# Altium PCB PCB_2020-10-26_09-59-11_2021-08-17.pcbdoc
Units mm, origin at the board's own origin, x right, y up, seen from the top; angles counter-clockwise.
Board outline 98.82 x 71.83 mm, 2 copper layers (Top Layer, Bottom Layer); 37 components, 72 nets, 204 pads, 26 vias.
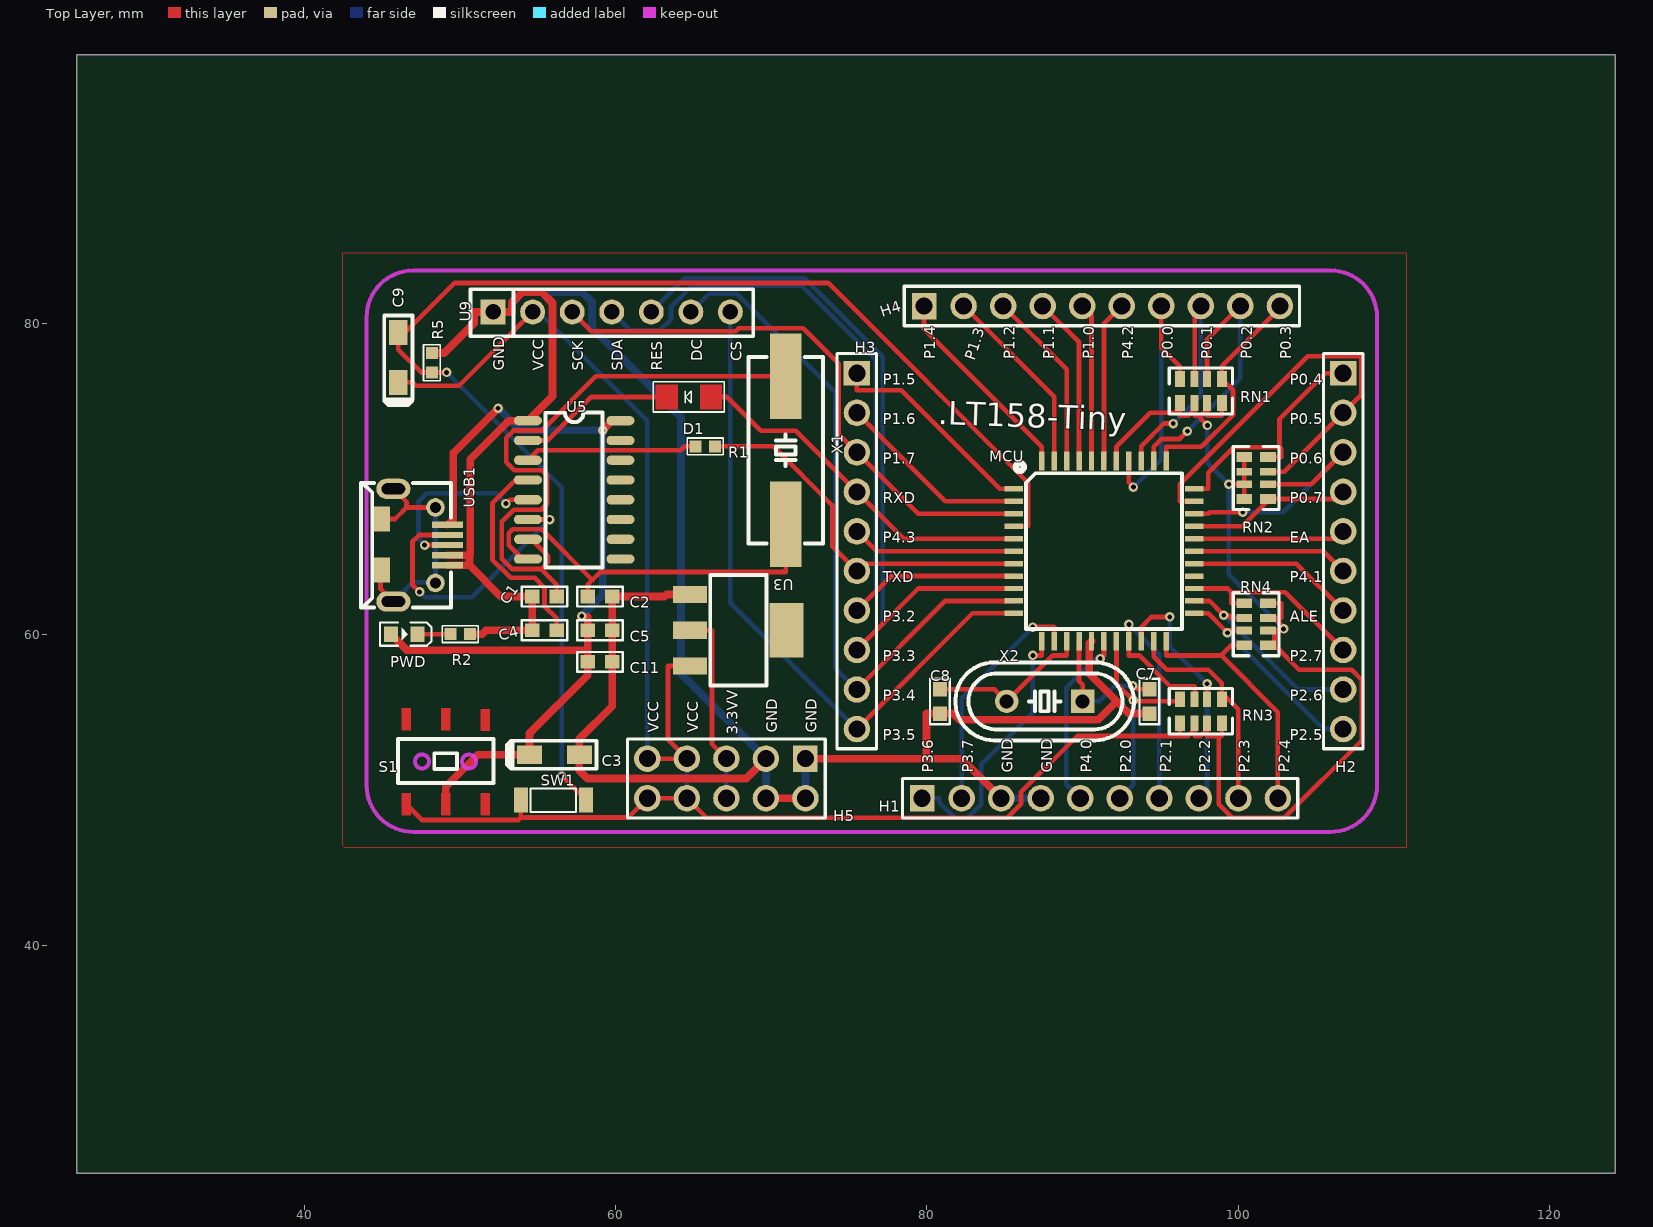
[diagram p0: Top Layer view]
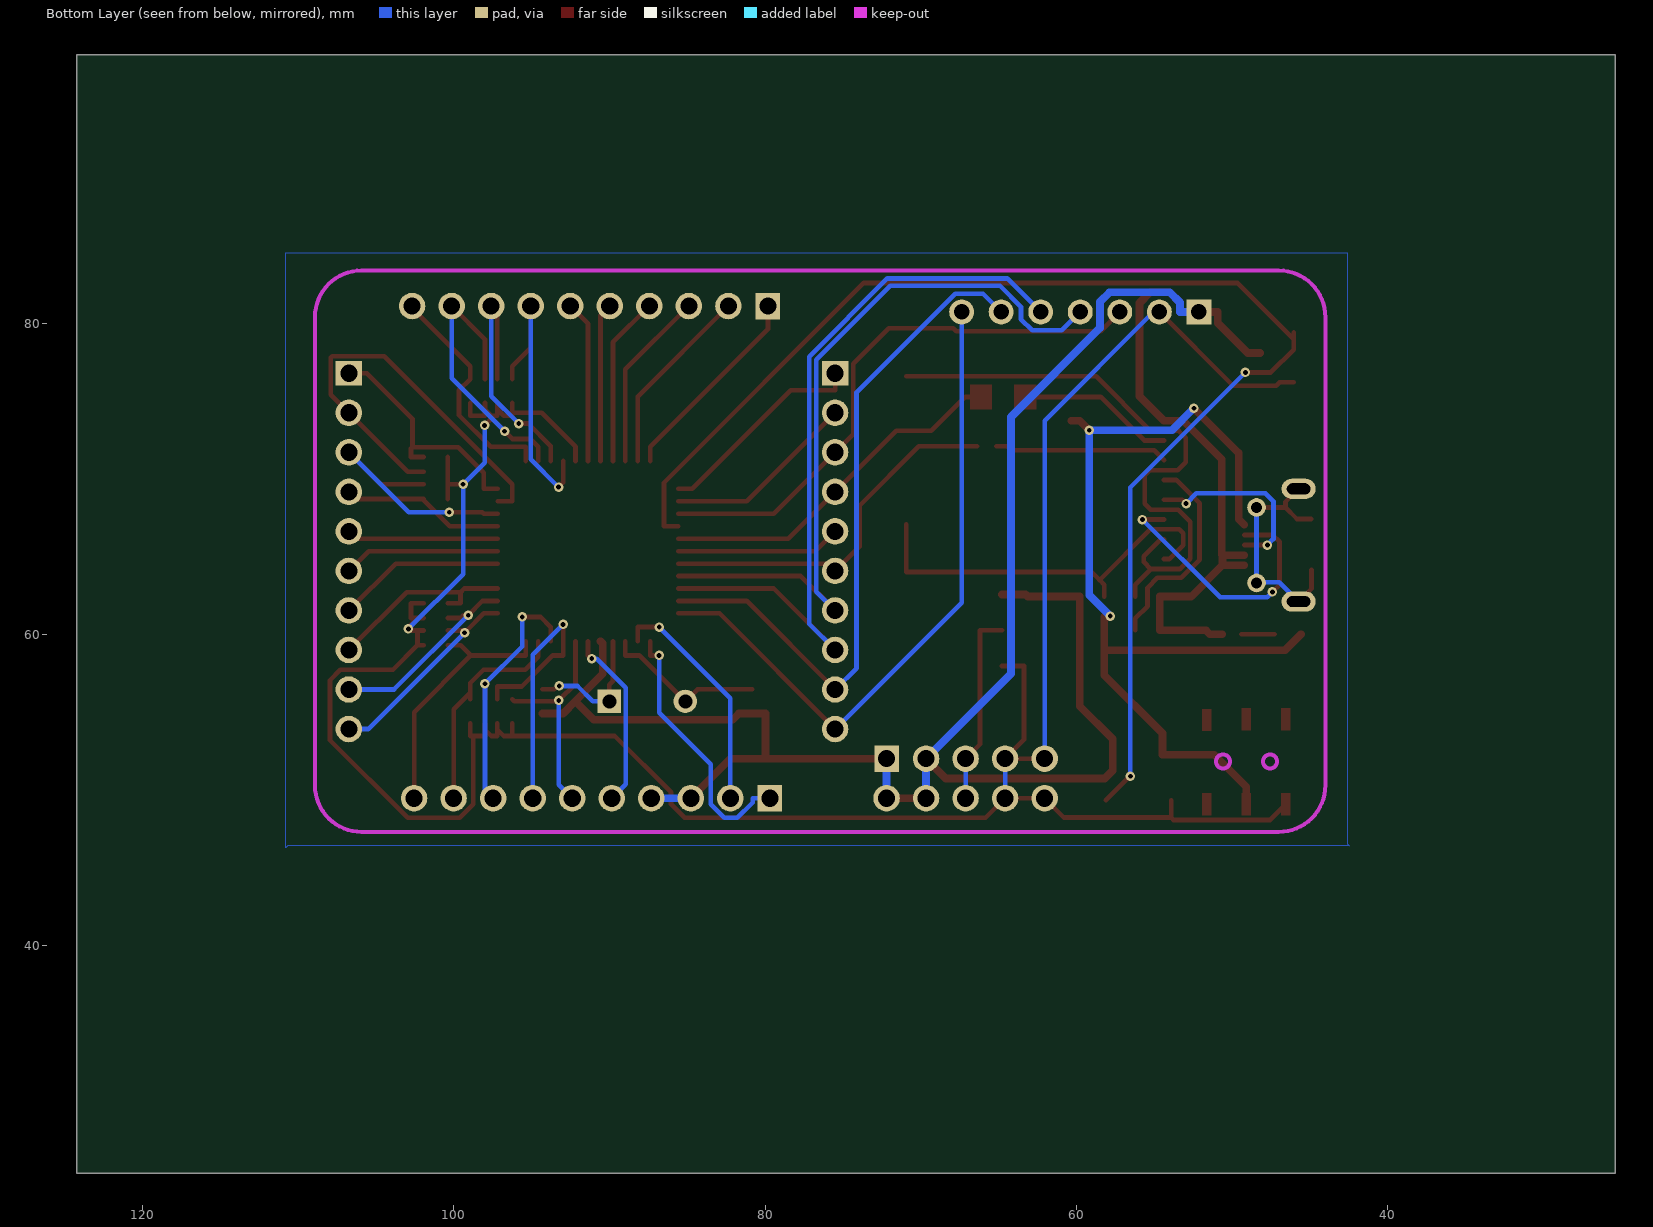
[diagram p1: Bottom Layer view, seen from below]

## Layer stack, top to bottom
Top Layer: signal copper (thickness not stored)
Dielectric: dielectric 0.32, FR-4, Dk 4.8
Bottom Layer: signal copper (thickness not stored)

## Board outline
124.216,25.4 25.4,25.4 25.4,97.235 124.216,97.235

## Components (designator, comment, footprint, x,y, rotation, side; value= is the part's Value field where it differs from the comment)
C1 "30pf" CAP0603 55.441,62.437 r0 top
C2 "30pf" CAP0603 58.997,62.437 r0 top
C3 "470uF" CAP-T3216-A 56.076,52.277 r0 top
C4 "0.1uf" CAP0603 55.441,60.278 r180 top
C5 "0.1uf" CAP0603 58.997,60.278 r180 top
C7 "30pf" CAP0603 94.303,55.706 r90 top
C8 "30pf" CAP0603 80.841,55.706 r90 top
C9 "10uF" CAP-T3216-A 46.043,77.804 r90 top
C11 "104" CAP0603 58.997,58.246 r180 top
D1 "1N4148" D-1206 64.712,75.264 r90 top
H1 "Header-Male-2.54_1x10" HDR-TH_10P-P2.54-V 91.128,49.483 r0 top
H2 "Header-Male-2.54_1x10" HDR-TH_10P-P2.54-V 106.749,65.358 r270 top
H3 "Header-Male-2.54_1x10" HDR-TH_10P-P2.54-V 75.507,65.358 r270 top
H4 "Header-Male-2.54_1x10" HDR-TH_10P-P2.54-V 91.255,81.106 r0 top
H5 "X6521FV-2×05-C85D32" HDR-TH_10P-P2.54-V-F-R2-C5-S2.54 67.125,50.753 r180 top
MCU "STC89C52RC-40I_LQFP44" LQFP-44_L10.0-W10.0-P0.80-LS12.0-BL 91.382,65.358 r270 top
PWD "led Green" D0603-RD 46.424,60.024 r180 top
R1 "100" 0603 66.363,72.089 r0 top
R2 "1k" 0603 50.615,60.024 r0 top
R5 "1K" 0603 48.202,78.058 r90 top
RN1 "10K*4" 0603_X4 97.605,75.645 r180 top
RN2 "10K*4" 0603_X4 101.161,70.057 r90 top
RN3 "10K*4" 0603_X4 97.605,55.071 r180 top
RN4 "10K*4" 0603_X4 101.161,60.659 r270 top
S1 "六脚贴片拨动开关" MSS-22C02 51.631,49.102 r90 top
SW1 "UK-B0240-W-250-JZ" 龟仔微动 53.917,49.356 r0 top
U3 "AMS1117" SOT-223_L6.7-W3.5-P2.30-BR 67.887,60.278 r180 top
U5 "CH340G" SOIC-16_L9.9-W3.9-P1.27-LS6.0-BR 57.346,69.295 r180 top
U9 "OLED_SPI_12864" 2.54-7P 59.759,80.725 r0 top
USB1 "microusb" MICRO-USB-SMD_5P-P0.65-H-F_C10418 47.059,65.739 r270 top
X1 "12M" HC-49-SMD_L12.0-W4.8 70.935,71.835 r270 top
X2 "11.0592M" HC-49US_L11.5-W4.5-P4.88 87.572,55.706 r180 top
? "" ? 76.396,46.039 r0 top
? "" ? 44.065,65.358 r0 top
? "" ? 102.621,65.513 r0 top
? "" ? 91.051,53.801 r0 top
? "" ? 50.736,67.725 r0 top

## Footprints (in the part's own frame and the unit in brackets; to place one, negate y for a bottom-side part, rotate by r counter-clockwise, add the part's x,y. Pads: shape width x height; smd on the part's side, far side on the other; paste and mask are expansions set on the pad)
2.54-7P [mm]
  rect 1.6x1.6 hole 1: 1(-7.62,0)
  round 1.6 hole 1: 2(-5.08,0) 3(-2.54,0) 4(0,0) 5(2.54,0) 6(5.08,0) 7(7.62,0)
  silkscreen extent -9.09,-1.56 9.09,1.46
0603 [mil]
  rect 30x30 smd: 1(1,0) 2(-48,0)
  silkscreen extent -69,-21 22,21
0603_X4 [mm]
  rect 0.635x1.016 smd: 1(-1.35,-0.77) 4(1.35,-0.77) 5(1.35,0.77) 8(-1.35,0.77)
  rect 0.508x1.016 smd: 2(-0.4,-0.77) 3(0.4,-0.77) 6(0.4,0.77) 7(-0.4,0.77)
  silkscreen extent -2.02,-1.47 2.02,1.47
CAP0603 [mil]
  rect 37x35 smd: 1(-31,0) 2(31,0)
  silkscreen extent -58,-25 58,25
CAP-T3216-A [mm]
  rect 1.6x1.2 smd: 1(-1.6,0) 2(1.6,0)
  silkscreen extent -3.05,-0.9 2.7,0.9
D0603-RD [mm]
  rect 0.9x1 smd: 1(-0.85,0) 2(0.85,0)
  silkscreen extent -1.75,-0.75 1.55,0.75
D-1206 [mm]
  round 0 smd: 1(0,-1.425) 2(0,1.425)
  Top Layer region: 0.787,2.123 0.787,0.726 -0.787,0.726 -0.787,2.123
  Top Layer region: 0.787,-0.726 0.787,-2.123 -0.787,-2.123 -0.787,-0.726
  silkscreen extent -0.97,-2.29 0.97,2.29
HC-49-SMD_L12.0-W4.8 [mm]
  rect 5.5x2 smd: 1(-4.75,0) 2(4.75,0)
  silkscreen extent -6,-2.4 6,2.4
HC-49US_L11.5-W4.5-P4.88 [mm]
  rect 1.5x1.5 hole 0.9: 1(-2.438,0)
  round 1.5 hole 0.9: 2(2.438,0)
  silkscreen extent -5.74,-2.5 5.74,2.5
HDR-TH_10P-P2.54-V [mm]
  rect 1.575x1.7 hole 1.1: 1(-11.43,0)
  round 1.7 hole 1.1: 2(-8.89,0) 3(-6.35,0) 4(-3.81,0) 5(-1.27,0) 6(1.27,0) 7(3.81,0) 8(6.35,0) 9(8.89,0) 10(11.43,0)
  silkscreen extent -12.7,-1.27 12.7,1.27
HDR-TH_10P-P2.54-V-F-R2-C5-S2.54 [mm]
  rect 1.575x1.7 hole 1.1: 1(-5.08,-1.27)
  round 1.7 hole 1.1: 2(-5.08,1.27) 3(-2.54,-1.27) 4(-2.54,1.27) 5(0,-1.27) 6(0,1.27) 7(2.54,-1.27) 8(2.54,1.27) 9(5.08,-1.27) 10(5.08,1.27)
  silkscreen extent -6.35,-2.54 6.35,2.54
LQFP-44_L10.0-W10.0-P0.80-LS12.0-BL [mil]
  rect 13.8x47.24 smd: 1(-157.48,-228) 2(-125.98,-228) 3(-94.49,-228) 4(-62.99,-228) 5(-31.5,-228) 6(0,-228) 7(31.5,-228) 8(62.99,-228) 9(94.49,-228) 10(125.98,-228) 11(157.48,-228) 23(157.48,228) 24(125.98,228) 25(94.49,228) 26(62.99,228) 27(31.5,228) 28(0,228) 29(-31.5,228) 30(-62.99,228) 31(-94.49,228) 32(-125.98,228) 33(-157.48,228)
  rect 47.24x13.8 smd: 12(228,-157.48) 13(228,-125.98) 14(228,-94.49) 15(228,-62.99) 16(228,-31.5) 17(228,0) 18(228,31.5) 19(228,62.99) 20(228,94.49) 21(228,125.98) 22(228,157.48) 34(-228,157.48) 35(-228,125.98) 36(-228,94.49) 37(-228,62.99) 38(-228,31.5) 39(-228,0) 40(-228,-31.5) 41(-228,-62.99) 42(-228,-94.49) 43(-228,-125.98) 44(-228,-157.48)
  silkscreen extent -223,-223 197,197
MICRO-USB-SMD_5P-P0.65-H-F_C10418 [mm]
  oval 1.3x2.2 hole 0.7 slot 1.5 at 90 deg: 0(-3.619,-1.329) 0(3.619,-1.329)
  round 1.2 hole 0.7: 0(-2.425,1.371) 0(2.425,1.371)
  rect 1.6x1.2 smd: 0(-1.683,-2.14) 0(1.596,-2.156)
  rect 0.4x2 smd: 1(-1.31,2.156) 2(-0.66,2.156) 3(-0.01,2.156) 4(0.64,2.156) 5(1.29,2.156)
  silkscreen extent -4,-3.4 4,2.36
MSS-22C02 [mil]
  round 0 smd: 1(0,0) 2(0,100) 3(0,200) 4(215,200) 5(215,100) 6(212.6,0)
  Top Layer region: -27.56,-11.81 -27.56,11.81 27.56,11.81 27.56,-11.81
  Top Layer region: -27.56,88.19 -27.56,111.81 27.56,111.81 27.56,88.19
  Top Layer region: -27.56,188.19 -27.56,211.81 27.56,211.81 27.56,188.19
  Top Layer region: 185.04,-11.81 185.04,11.81 240.16,11.81 240.16,-11.81
  Top Layer region: 187.44,88.19 187.44,111.81 242.56,111.81 242.56,88.19
  Top Layer region: 187.44,188.19 187.44,211.81 242.56,211.81 242.56,188.19
  Keep-Out Layer lines w10: 125.72,160.19 ccw(c108,160.1) 125.72,160 ; 125.72,41.19 ccw(c108,41.1) 125.72,41
  silkscreen extent 54,-21 164,221
SOIC-16_L9.9-W3.9-P1.27-LS6.0-BR [mm]
  oval 1.8x0.6 smd: 1(2.972,-4.445) 2(2.972,-3.175) 3(2.972,-1.905) 4(2.972,-0.635) 5(2.972,0.635) 6(2.972,1.905) 7(2.972,3.175) 8(2.972,4.445) 9(-2.972,4.445) 10(-2.972,3.175) 11(-2.972,1.905) 12(-2.972,0.635) 13(-2.972,-0.635) 14(-2.972,-1.905) 15(-2.972,-3.175) 16(-2.972,-4.445)
  silkscreen extent -1.83,-4.98 1.85,4.98
SOT-223_L6.7-W3.5-P2.30-BR [mm]
  rect 2.2x1.1 smd: 1(3.099,-2.3) 2(3.099,0) 3(3.099,2.3)
  rect 2.2x3.5 smd: 4(-3.099,0)
  silkscreen extent -1.8,-3.55 1.8,3.55
龟仔微动 [mm]
  rect 0.9x1.6 smd: 1(0,0) 2(4.191,0)
  silkscreen extent 0.64,-0.76 3.56,0.76
? [mm]

## Via types
v1: diameter 0.61, hole 0.31, Top Layer to Bottom Layer, 26 vias

## Nets (pads, with @x,y where several pads share a name; then routed paths per layer and width w, separated by ;. In a path a pad name is that pad's centre, name@x,y a point inside that pad or via, vN(x,y) a via of type N, cw(c..) or ccw(c..) an arc to the next point about the centre after c; other vN are vias at no path point)
3.3V: H5.5 H5.6 U3.2 | length 12.6
  Top Layer w0.3: U3.2 66.2,60.278 66.2,52.947 H5.5
  Bottom Layer w0.3: H5.6 H5.5
+5V: C3.1 C5.2 C11.2 PWD.2 S1.2 U5.16 USB1.1 | length 61.2
  Top Layer w0.5: PWD.2 46.607,58.99 58.209,58.99 ; S1.2 49.091,50.212 51.156,52.277 C3.1 54.476,53.659 58.209,57.39 C11.2 58.209,58.99 ; USB1.1 49.578,67.413 49.578,71.654 v1(52.459,74.535) ; v1(57.826,61.19) 57.882,61.131 58.209,61.131 C5.2 58.209,58.99 ; v1(59.175,73.128) 59.787,73.74 U5.16
  Bottom Layer w0.5: v1(52.459,74.535) 53.866,73.128 v1(59.175,73.128) 59.175,62.538 v1(57.826,61.19)
ALE: H2.7 MCU.27 | length 10.8
  Top Layer w0.3: MCU.27 103.739,64.558 H2.7
CH340R: R1.2 U5.3 | length 11.1
  Top Layer w0.3: U5.3 55.009,71.835 64.196,71.835 64.45,72.089 R1.2
CH340T: D1.2 U5.2 | length 10.1
  Top Layer w0.3: U5.2 55.644,72.47 58.438,75.264 62.276,75.264 D1.2
DM: U5.6 USB1.2 | length 17.8
  Top Layer w0.3: v1(47.409,62.734) 46.955,63.186 46.955,65.95 47.407,66.399 USB1.2 ; U5.6 v1(55.766,67.39)
  Bottom Layer w0.3: v1(47.409,62.734) 47.742,62.401 50.777,62.401 v1(55.766,67.39)
DP: U5.5 USB1.3 | length 12.1
  Top Layer w0.3: v1(47.737,65.749) 47.902,65.749 USB1.3@49.215,65.749 ; v1(52.954,68.416) 53.195,68.66 U5.5
  Bottom Layer w0.3: v1(47.737,65.749) 47.346,66.14 47.346,68.563 47.859,69.076 52.294,69.076 v1(52.954,68.416)
EA: H2.5 MCU.29 | length 9.8
  Top Layer w0.3: MCU.29 106.279,66.158 H2.5
GND: C1.1 C2.2 C3.2 C4.2 C5.1 C7.1 C8.1 C11.1 H1.3 H1.4 H5.1 H5.2 H5.3 H5.4 MCU.16 R2.1 R5.1 U3.1 U5.1 U9.1 USB1.4 USB1.5 | length 162.1
  Top Layer w0.5: R5.1 48.994,78.083 50.93,80.019 50.93,80.725 U9.1 53.35,80.725 53.35,81.329 54.011,81.992 55.26,81.992 55.949,81.304 55.949,75.315 U5.1 53.147,73.74 50.663,71.256 50.663,65.137 50.625,65.099 ; USB1.5@49.215,64.448 50.48,64.448 ; USB1.4@49.215,65.099 50.625,65.099 ; R2.1 51.433,60.024 51.687,60.278 C4.2 C1.1 52.637,62.437 50.625,64.448 50.48,64.448 ; U3.1@64.788,62.576 63.277,62.576 63.137,62.437 C2.2 C5.1 C11.1 59.784,55.396 57.676,53.288 C3.2 57.676,51.266 58.189,50.753 68.395,50.753 H5.3 ; H5.4 H5.2 ; H5.1 79.987,52.023 ; H1.3 82.238,52.023 79.987,52.023 ; MCU.16 90.432,59.417 90.432,57.474 92.2,55.708 ; C7.1 93.876,54.918 92.987,54.918 92.2,55.708 ; 50.48,64.448 50.625,64.596 50.625,65.099 ; 79.987,52.023 79.987,54.918 C8.1 81.697,54.918 82.088,54.527 91.018,54.527 92.2,55.708
  Bottom Layer w0.5: U9.1 53.35,80.725 53.35,81.329 54.013,81.995 57.871,81.995 58.489,81.378 58.489,79.699 64.211,73.973 64.211,57.476 H5.3 H5.4 ; H5.2 H5.1 ; H1.3 H1.4
P0.0: H4.7 MCU.37 RN1.4 | length 19.4
  Top Layer w0.3: MCU.37 92.982,69.772 v1(93.279,69.475) ; H4.7 95.065,78.426 96.256,77.235 RN1.4@96.256,76.414
  Bottom Layer w0.3: v1(93.279,69.475) 95.065,71.261 H4.7
P0.1: H4.8 MCU.36 RN1.3 | length 16.8
  Top Layer w0.3: MCU.36 93.782,72.109 95.23,73.557 v1(95.837,73.557) ; RN1.3@97.206,76.414 97.206,80.704 H4.8
  Bottom Layer w0.3: v1(95.837,73.557) 97.605,75.322 H4.8
P0.2: H4.9 MCU.35 RN1.2 | length 18.5
  Top Layer w0.3: MCU.35 94.582,72.061 95.088,72.566 96.248,72.566 v1(96.741,73.056) ; RN1.2@98.006,76.414 98.006,78.965 H4.9
  Bottom Layer w0.3: v1(96.741,73.056) 100.145,76.463 H4.9
P0.3: H4.10 MCU.34 RN1.1 | length 14.9
  Top Layer w0.3: MCU.34 95.382,72.061 97.63,72.061 99.675,74.106 99.675,75.696 98.956,76.414 98.956,77.235 102.685,80.966 H4.10
P0.4: H2.1 MCU.33 RN2.4 | length 15.8
  Top Layer w0.3: MCU.33 98.085,69.358 98.085,70.397 99.723,72.038 102.664,72.038 ; RN2.4@101.93,71.405 102.751,71.405 102.751,71.949 102.664,72.038 ; H2.1 105.585,76.788 102.664,73.864 102.664,72.038
P0.5: H2.2 MCU.32 RN2.3 | length 27.5
  Top Layer w0.3: MCU.32 96.261,68.558 96.261,69.663 104.486,77.888 107.823,77.888 107.912,77.799 107.912,75.411 H2.2 102.959,70.456 102.751,70.456 RN2.3@101.93,70.456
P0.6: H2.3 MCU.31 RN2.2 | length 16.9
  Top Layer w0.3: MCU.31 98.085,67.758 98.184,67.855 v1(100.297,67.855) ; RN2.2@101.93,69.655 104.699,69.655 H2.3
  Bottom Layer w0.3: v1(100.297,67.855) 102.896,67.855 H2.3
P0.7: H2.4 MCU.30 RN2.1 | length 10.5
  Top Layer w0.3: MCU.30 100.272,66.958 101.93,68.617 101.93,68.705 106.289,68.705 H2.4
P1.0: H4.5 MCU.40 | length 10.2
  Top Layer w0.3: H4.5 90.582,80.509 MCU.40
P1.1: H4.4 MCU.41 | length 10.9
  Top Layer w0.3: H4.4 89.782,78.769 MCU.41
P1.2: H4.3 MCU.42 | length 11.6
  Top Layer w0.3: H4.3 88.981,77.029 MCU.42
P1.3: H4.2 MCU.43 | length 12.4
  Top Layer w0.3: H4.2 88.181,75.289 MCU.43
P1.4: H4.1 MCU.44 | length 13.1
  Top Layer w0.3: H4.1 79.825,79.617 87.381,72.061 MCU.44
P1.5: H3.1 MCU.1 | length 13.8
  Top Layer w0.3: H3.1 75.507,75.688 78.349,75.688 84.679,69.358 MCU.1
P1.6: H3.2 MCU.2 | length 12.4
  Top Layer w0.3: H3.2 81.196,68.558 MCU.2
P1.7: H3.3 MCU.3 U9.3 | length 36.5
  Top Layer w0.3: U9.3 58.451,79.493 67.732,79.493 67.925,79.683 72.05,79.683 74.343,77.387 74.343,72.871 H3.3 79.456,67.758 MCU.3
P2.0: H1.6 MCU.18 RN3.4 | length 14
  Top Layer w0.3: MCU.18 92.182,56.846 v1(93.264,55.764) 93.322,55.706 96.119,55.706 RN3.4@96.256,55.84
  Bottom Layer w0.3: H1.6 93.264,50.349 v1(93.264,55.764)
P2.1: H1.7 MCU.19 RN3.3 | length 19.9
  Top Layer w0.3: v1(92.982,60.654) MCU.19 92.982,58.655 93.642,58.655 95.636,56.661 97.206,56.661 RN3.3@97.206,55.84
  Bottom Layer w0.3: v1(92.982,60.654) 94.938,58.698 H1.7
P2.2: H1.8 MCU.20 RN3.2 | length 16.9
  Top Layer w0.3: MCU.20 93.782,60.478 94.435,61.131 v1(95.608,61.131) ; RN3.2@98.006,55.84 v1(98.006,56.834)
  Bottom Layer w0.3: v1(95.608,61.131) 95.608,59.231 v1(98.006,56.834) 98.006,50.009 H1.8
P2.3: H1.9 MCU.21 RN3.1 | length 14.3
  Top Layer w0.3: MCU.21 94.582,58.571 95.41,57.743 98.097,57.743 98.956,56.887 98.956,56.661 RN3.1@98.956,56.252 ; RN3.1@98.956,55.84 RN3.1@98.956,56.252 ; H1.9 100.018,55.188 RN3.1@98.956,56.252
P2.4: H1.10 MCU.22 RN4.4 | length 16.9
  Top Layer w0.3: MCU.22 95.382,58.655 98.915,58.655 ; RN4.4@100.391,59.307 99.571,59.307 98.915,58.655 ; H1.10 102.558,55.012 98.915,58.655
P2.5: H2.10 MCU.23 RN4.3 | length 13.8
  Top Layer w0.3: MCU.23@97.173,61.357 98.085,61.357 99.185,60.257 v1@99.312,60.257 ; v1(99.312,60.118) v1@99.312,60.257 ; RN4.3@100.391,60.257 v1@99.312,60.257
  Bottom Layer w0.3: v1(99.312,60.118) 105.504,53.928 H2.10
P2.6: H2.9 MCU.24 RN4.2 | length 13.3
  Top Layer w0.3: MCU.24@97.173,62.157 98.161,62.157 v1(99.078,61.24) 99.39,61.24 99.571,61.058 RN4.2@100.391,61.058
  Bottom Layer w0.3: v1(99.078,61.24) 103.851,56.468 H2.9
P2.7: H2.8 MCU.25 RN4.1 | length 12.7
  Top Layer w0.3: MCU.25@97.173,62.957 99.334,62.957 99.571,62.721 ; RN4.1@100.391,62.007 99.571,62.007 99.571,62.721 ; H2.8 103.035,62.721 99.571,62.721
P3.2: H3.7 MCU.8 U9.4 | length 48.7
  Top Layer w0.3: H3.7 77.717,63.758 MCU.8
  Bottom Layer w0.3: U9.4 60.942,79.541 62.852,79.541 63.569,80.257 63.569,81.068 64.915,82.414 71.961,82.414 76.713,77.662 76.713,62.752 H3.7
P3.3: H3.8 MCU.9 U9.5 | length 49.1
  Top Layer w0.3: H3.8 79.456,62.957 MCU.9@85.591,62.957
  Bottom Layer w0.3: U9.5 64.45,82.876 72.151,82.876 77.175,77.855 77.175,60.677 H3.8
P3.4: H3.9 MCU.10 U9.6 | length 44.5
  Top Layer w0.3: H3.9 81.196,62.157 MCU.10@85.591,62.157
  Bottom Layer w0.3: U9.6 66.007,81.893 67.798,81.893 74.13,75.561 74.13,57.844 H3.9
P3.5: H3.10 MCU.11 U9.7 | length 43.3
  Top Layer w0.3: H3.10 82.936,61.357 MCU.11@85.591,61.357
  Bottom Layer w0.3: U9.7 67.379,62.056 H3.10
P3.6: H1.1 MCU.12 | length 17.3
  Top Layer w0.3: v1(86.815,58.655) 87.381,58.655 MCU.12
  Bottom Layer w0.3: H1.1 80.798,49.483 80.798,49.208 81.786,48.22 82.639,48.22 83.508,49.089 83.508,51.657 86.815,54.964 v1(86.815,58.655)
P3.7: H1.2 MCU.13 | length 15.2
  Top Layer w0.3: v1(86.81,60.478) 88.181,60.478 MCU.13
  Bottom Layer w0.3: H1.2 82.238,55.906 v1(86.81,60.478)
P4.0: H1.5 MCU.17 | length 11.7
  Top Layer w0.3: v1(91.148,58.454) 91.349,58.655 91.382,58.655 MCU.17
  Bottom Layer w0.3: H1.5 88.948,50.392 88.948,56.59 90.813,58.454 v1(91.148,58.454)
P4.1: H2.6 MCU.28 | length 10.1
  Top Layer w0.3: MCU.28 105.479,65.358 H2.6
P4.2: H4.6 MCU.39 | length 10.4
  Top Layer w0.3: MCU.39 91.382,79.963 H4.6
P4.3: H3.5 MCU.6 | length 10.6
  Top Layer w0.3: H3.5 76.777,65.358 MCU.6
PSEN: MCU.26
R2_2: PWD.1 R2.2 | length 2.1
  Top Layer w0.3: PWD.1 48.037,60.024 R2.2
RST: C9.2 MCU.4 R5.2 SW1.2 | length 87
  Top Layer w0.3: C9.2 C9.2@46.043,78.975 ; v1(49.142,76.844) 48.9,76.844 48.895,76.839 R5.2 47.508,76.839 46.055,78.291 46.043,78.291 C9.2@46.043,78.975 ; v1(56.538,50.892) 56.571,50.892 SW1.2 ; MCU.4 86.502,66.958 86.502,69.76 73.675,82.587 49.657,82.587 C9.2@46.043,78.975
  Bottom Layer w0.3: v1(49.142,76.844) 56.538,69.447 v1(56.538,50.892)
RXD: D1.1 H3.4 MCU.5 | length 23.2
  Top Layer w0.3: D1.1 67.148,75.264 69.327,73.084 71.59,73.084 H3.4 78.517,66.158 MCU.5
S1_1: S1.1
S$53: 
S$4048: 
S$4064: 
S$4075: 
S$4216: 
S$4620: 
S$4643: 
S$4648: 
TXD: H3.6 MCU.7 R1.1 | length 24.3
  Top Layer w0.3: R1.1 70.137,72.089 73.937,68.289 73.937,65.657 H3.6 75.977,64.558 MCU.7
U3_4: U3.4
U5_4: C4.1 U5.4 | length 13.7
  Top Layer w0.3: U5.4 53.592,69.93 52.093,68.431 52.093,64.817 53.261,63.648 54.798,63.648 55.436,63.011 55.436,61.827 56.228,61.035 C4.1
U5_7: C1.2 U5.7 X1.1 | length 39.5
  Top Layer w0.3: U5.7 54.592,66.12 55.679,65.033 55.679,64.664 55.217,64.205 ; C1.2 56.228,63.194 55.217,64.205 ; X1.1 58.733,76.585 55.253,73.105 53.447,73.105 52.982,72.64 52.982,71.083 53.503,70.565 55.286,70.565 55.611,70.24 55.611,68.396 55.24,68.025 53.467,68.025 52.682,67.24 52.682,64.883 53.36,64.205 55.217,64.205
U5_8: C2.1 U5.8 X1.2 | length 26.1
  Top Layer w0.3: U5.8 54.034,64.85 53.145,65.739 53.145,66.501 53.399,66.755 55.271,66.755 58.519,63.504 ; C2.1 58.209,63.194 58.519,63.504 ; X1.2 70.935,64.022 59.037,64.022 58.519,63.504
U5_9: U5.9
U5_10: U5.10
U5_11: U5.11
U5_12: U5.12
U5_13: U5.13
U5_14: U5.14
U5_15: U5.15
USB1_0: USB1.0 | length 15.8
  Top Layer w0.3: USB1.0@44.902,64.144 44.902,62.947 USB1.0@45.73,62.119 ; USB1.0@44.92,67.423 45.832,67.423 46.574,68.164 ; USB1.0@45.73,69.358 46.574,68.515 46.574,68.164 ; USB1.0@48.43,68.164 46.574,68.164
  Bottom Layer w0.3: USB1.0@45.73,62.119 46.962,63.351 48.392,63.351 48.43,63.313 USB1.0@48.43,68.164
VCC: C9.1 H5.7 H5.8 H5.9 H5.10 MCU.38 RN1.5 RN1.6 RN1.7 RN1.8 RN2.5 RN2.6 RN2.7 RN2.8 RN3.5 RN3.6 RN3.7 RN3.8 RN4.5 RN4.6 RN4.7 RN4.8 S1.3 SW1.1 U3.3 U9.2 | length 181
  Top Layer w0.3: C9.1@46.043,76.204 46.955,76.204 47.168,75.99 49.944,75.99 U9.2 ; S1.3 47.564,48.088 53.762,48.088 53.917,48.243 ; SW1.1 53.917,48.36 53.917,48.243 ; H5.9 H5.7 63.376,53.232 63.376,57.977 U3.3@64.788,57.977 ; MCU.38 92.182,71.606 92.182,72.061 94.369,74.25 96.256,74.25 ; RN3.5 96.256,53.481 ; RN1.5 96.256,74.464 96.256,74.443 96.256,74.25 ; RN3.6 RN3.6@97.206,53.89 ; RN1.6 RN1.6@97.206,74.464 ; RN3.7 RN3.7@98.006,53.89 ; RN1.7 RN1.7@98.006,74.464 ; v1(98.024,73.43) 97.595,73.859 97.595,74.055 ; RN3.8 98.956,53.481 98.748,53.481 ; RN1.8 98.956,74.055 98.006,74.055 RN1.7@98.006,74.464 ; v1(99.406,69.655) 99.571,69.655 RN2.7@100.391,69.655 ; RN2.8@100.391,68.705 RN2.7@100.391,69.655 ; RN2.5@100.391,71.405 100.391,70.456 RN2.7@100.391,69.655 ; RN4.5@101.93,59.307 RN4.5@102.342,59.307 ; RN4.6@101.93,60.257 RN4.6@102.342,60.257 ; RN4.7@101.93,61.058 RN4.7@102.342,61.058 ; RN4.8@101.93,62.007 102.751,62.007 102.751,61.058 RN4.7@102.342,61.058 ; v1(102.926,60.362) v1@102.751,60.362 ; 53.917,48.243 60.805,48.243 H5.10 H5.8 65.847,48.22 85.179,48.22 86.048,49.089 86.048,49.866 89.662,53.481 96.256,53.481 ; 96.256,53.481 96.794,53.481 RN3.6@97.206,53.89 ; 96.256,74.25 96.256,74.055 96.794,74.055 RN1.6@97.206,74.464 ; RN3.6@97.206,53.89 97.206,53.481 97.595,53.481 RN3.7@98.006,53.89 ; RN1.6@97.206,74.464 97.206,74.055 97.595,74.055 ; 97.595,74.055 RN1.7@98.006,74.464 ; RN3.7@98.006,53.89 98.006,53.481 98.748,53.481 ; 98.748,53.481 98.748,49.089 99.616,48.22 102.972,48.22 107.96,53.209 107.96,57.072 107.295,57.738 103.912,57.738 RN4.5@102.342,59.307 ; RN4.5@102.342,59.307 RN4.6@102.342,60.257 ; RN4.6@102.342,60.257 102.751,60.257 v1@102.751,60.362 ; RN4.7@102.342,61.058 102.751,60.649 v1@102.751,60.362
  Bottom Layer w0.3: U9.2 55.052,80.725 62.045,73.732 H5.9 ; H5.8 H5.7 ; v1(98.024,73.43) 98.024,71.04 v1(99.406,69.655) 99.406,63.882 v1(102.926,60.362)
X1: C7.2 MCU.15 X2.1 | length 8.7
  Top Layer w0.3: MCU.15 89.782,56.996 90.01,56.767 X2.1 ; v1(93.226,56.694) 93.345,56.694 93.546,56.493 C7.2
  Bottom Layer w0.3: X2.1 91.072,55.706 92.06,56.694 v1(93.226,56.694)
X2: C8.2 MCU.14 X2.2 | length 10.6
  Top Layer w0.3: C8.2 84.346,56.493 X2.2 88.082,58.655 88.981,58.655 MCU.14
pads on no net: S1.4 S1.5 S1.6

## Polygon pours and split planes (outlines as drawn)
GND on Bottom Layer (solid): 42.614,84.535 42.614,46.562 42.487,46.435 110.686,46.435 110.813,46.308 110.813,84.535
GND on Top Layer (solid): 42.487,84.535 110.813,84.535 110.813,46.308 42.614,46.308 42.487,46.435

## Keep-outs
Keep-Out Layer:
  lines w0.254: 44.008,50.318 ccw(c47.008,50.318) 47.008,47.318 ; 44.008,80.388 cw(c47.008,80.388) 47.008,83.388 ; 105.929,47.318 ccw(c105.929,50.318) 108.929,50.318 ; 105.929,83.388 cw(c105.929,80.388) 108.929,80.388

## Silkscreen, mask and mechanical layers (free items; w line width, h text height)
Top Overlay:
  text "P1.4" at 80.556,77.677 h0.7 r90
  text "P1.2" at 85.636,77.677 h0.7 r90
  text "P1.1" at 88.176,77.677 h0.7 r90
  text "P1.0" at 90.716,77.671 h0.7 r89
  text "P4.2" at 93.256,77.677 h0.7 r90
  text "P0.0" at 95.796,77.671 h0.7 r89
  text "P0.1" at 98.336,77.677 h0.7 r90
  text "P0.2" at 100.876,77.671 h0.7 r89
  text "P0.3" at 103.416,77.677 h0.7 r90
  text "P1.3" at 83.079,77.569 h0.7 r72
  text "DC" at 65.57,77.55 h0.7 r90
  text "CS" at 68.11,77.55 h0.7 r90
  text "GND" at 52.852,76.935 h0.7 r90
  text "VCC" at 55.392,76.935 h0.7 r90
  text "SCK" at 57.932,76.935 h0.7 r90
  text "SDA" at 60.472,76.935 h0.7 r90
  text "RES" at 63.012,76.935 h0.7 r90
  text "P1.5" at 77.158,76.057 h0.7
  text "P0.4" at 103.32,76.057 h0.7
  text "P1.6" at 77.158,73.517 h0.7
  text ".LT158-Tiny" at 80.688,73.498 h1.5 r358
  text "P0.5" at 103.32,73.517 h0.7
  text "P1.7" at 77.158,70.977 h0.7
  text "P0.6" at 103.32,70.977 h0.7
  text "RXD" at 77.158,68.437 h0.7
  text "P0.7" at 103.32,68.437 h0.7
  text "P4.3" at 77.158,65.897 h0.7
  text "EA" at 103.32,65.897 h0.7
  text "TXD" at 77.158,63.357 h0.7
  text "P4.1" at 103.32,63.357 h0.7
  text "P3.2" at 77.158,60.817 h0.7
  text "ALE" at 103.32,60.817 h0.7
  text "P3.3" at 77.158,58.277 h0.7
  text "P2.7" at 103.32,58.277 h0.7
  text "P3.4" at 77.158,55.737 h0.7
  text "P2.6" at 103.32,55.737 h0.7
  text "VCC" at 62.776,53.674 h0.7 r90
  text "VCC" at 65.316,53.674 h0.7 r90
  text "GND" at 70.396,53.674 h0.7 r90
  text "GND" at 72.936,53.674 h0.7 r90
  text "3.3VV" at 67.856,53.547 h0.7 r90
  text "P3.5" at 77.158,53.197 h0.7
  text "P2.5" at 103.32,53.197 h0.7
  text "P3.6" at 80.429,51.134 h0.7 r90
  text "P3.7" at 82.969,51.134 h0.7 r90
  text "GND" at 85.509,51.134 h0.7 r90
  text "GND" at 88.049,51.134 h0.7 r90
  text "P4.0" at 90.589,51.134 h0.7 r90
  text "P2.0" at 93.129,51.134 h0.7 r90
  text "P2.1" at 95.668,51.122 h0.7 r88
  text "P2.2" at 98.209,51.134 h0.7 r90
  text "P2.3" at 100.749,51.134 h0.7 r90
  text "P2.4" at 103.288,51.122 h0.7 r88
Document:
  lines w0.254 net S$4620: 46.043,80.725 52.043,80.725 ; 67.379,80.725 73.379,80.725
  lines w0.254 net S$4643: 46.043,54.725 46.043,80.725 ; 73.379,54.725 73.379,80.725
  lines w0.254 net S$4648: 46.043,54.725 73.379,54.725